# Altium PCB Power_Taghsim.PcbDoc
Units mm, origin at the board's own origin, x right, y up, seen from the top; angles counter-clockwise.
Board outline 127.99 x 54.41 mm, 2 copper layers (Top Layer, Bottom Layer); 49 components, 17 nets, 123 pads, 145 vias.
Unrouted connection lines stored in the file: 1.
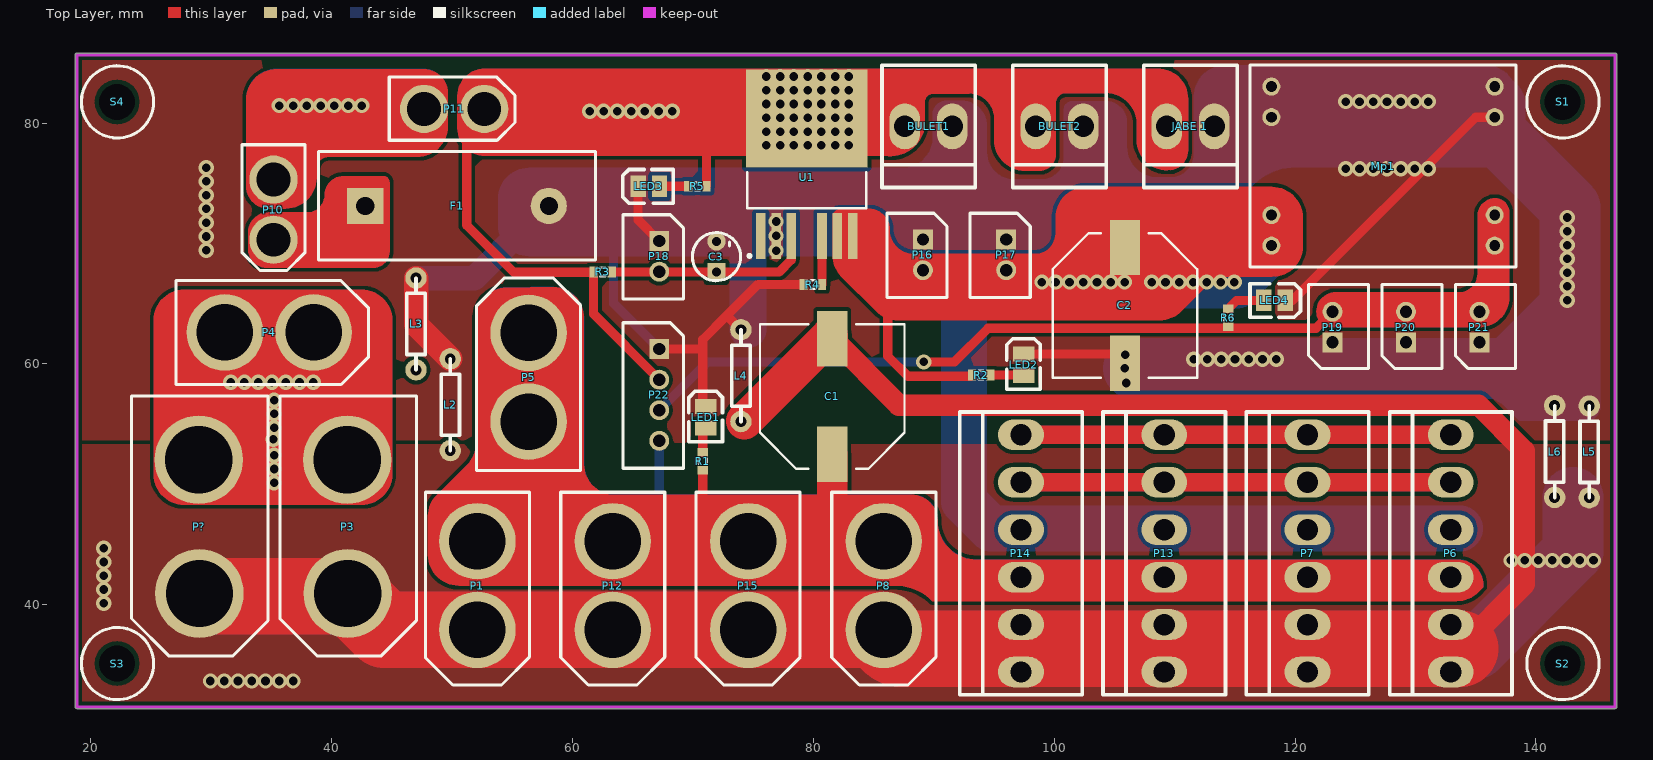
[diagram p0: Top Layer view]
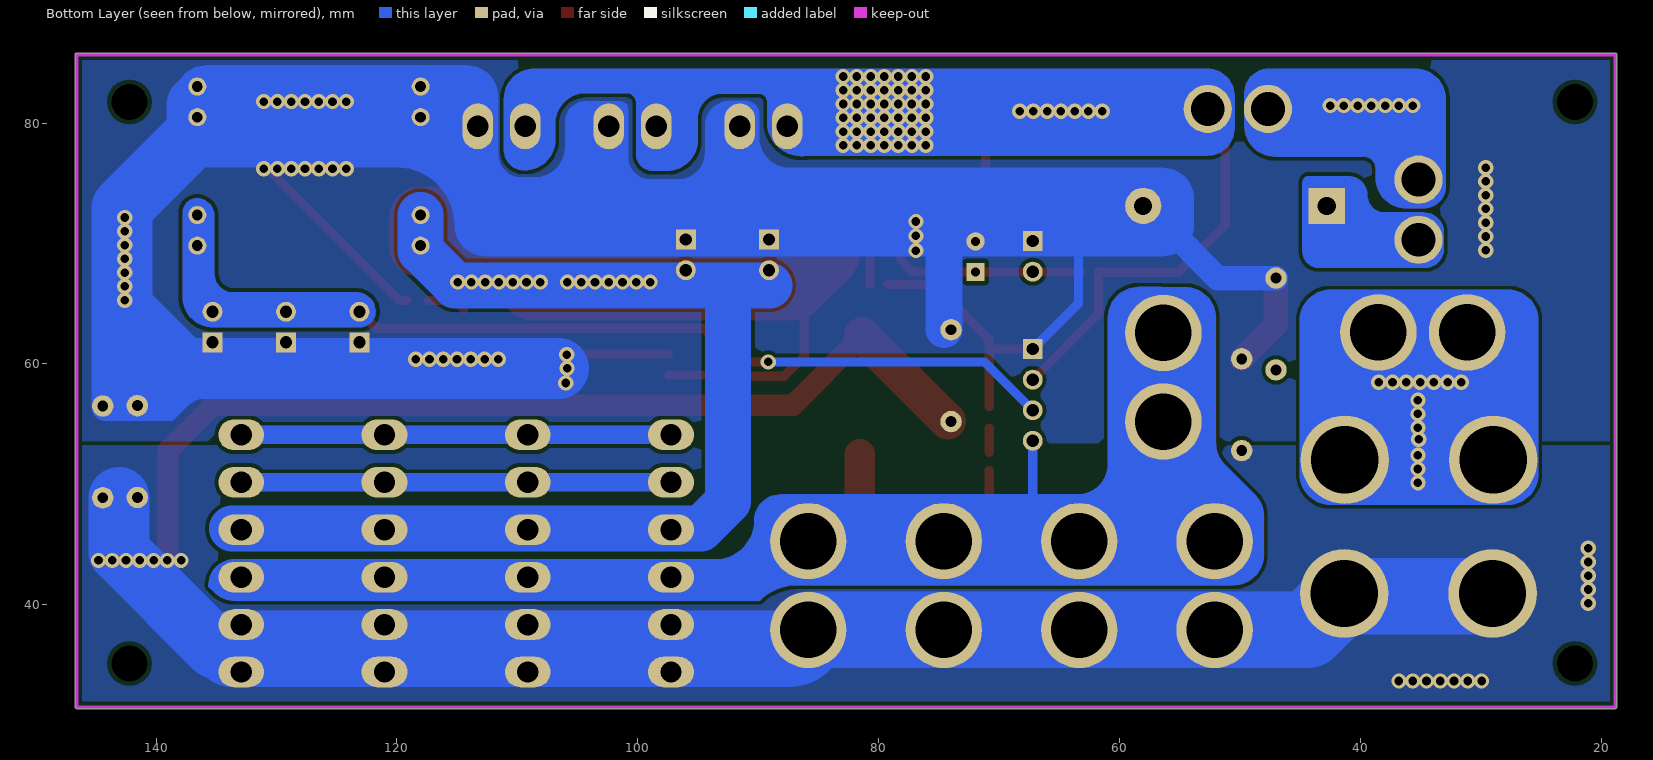
[diagram p1: Bottom Layer view, seen from below]

## Layer stack, top to bottom
Top Solder: solder mask 0.0102, Solder Resist, Dk 3.5
Top Layer: signal copper 0.0356
Dielectric 1: dielectric 0.32, FR-4, Dk 4.8
Bottom Layer: signal copper 0.0356
Bottom Solder: solder mask 0.0102, Solder Resist, Dk 3.5

## Board outline
18.847,31.394 cw(c18.847,31.521) 18.719,31.521 18.719,85.674 cw(c18.847,85.674) 18.847,85.802 146.583,85.802 cw(c146.583,85.674) 146.711,85.674 146.711,31.521 cw(c146.583,31.521) 146.583,31.394

## Design rules (kind name [scope] priority, off if disabled: settings)
AssemblyTestPointUsage [All] p1 off:
AssemblyTestpoint [All] p1 off: testpointundercomponent=TRUE minsize=1.016 maxsize=2.54 preferedsize=1.524 minholesize=0 maxholesize=1.016 preferedholesize=0.813 testpointgrid=0.025 usegrid=TRUE gridtolerance=0 allowsidetop=TRUE allowsidebottom=TRUE
Clearance Clearance_1 [All vs InPolygon] p1: gap=0.33 ignorepadtopadclearanceinfootprint=FALSE except(0: Arc-Hole Track-Hole SMDPad-Hole THPad-Hole Via-Hole Fill-Hole Poly-Hole Region-Hole Text-Hole)
Clearance [All] p2: gap=0.178 ignorepadtopadclearanceinfootprint=FALSE except(0: Arc-Hole Track-Hole SMDPad-Hole THPad-Hole Via-Hole Fill-Hole Poly-Hole Region-Hole Text-Hole)
ComponentClearance [All] p1 off: gap=0.254 collisioncheckmode=3 verticalgap=0.254 showdistances=FALSE
FabricationTestPointUsage [All] p1 off: valid=0 allowmultiple=FALSE
FabricationTestpoint [All] p1 off: side=3 testpointundercomponent=TRUE minsize=1.016 maxsize=2.54 preferedsize=1.524 minholesize=0 maxholesize=1.016 preferedholesize=0.813 testpointgrid=0.025 allowsidetop=TRUE allowsidebottom=TRUE usegrid=TRUE gridtolerance=0
Height [All] p1 off: minheight=0 maxheight=25.4 prefheight=12.7
HoleSize [All] p1 off: absolutevalues=TRUE maxlimit=2.54 minlimit=0.025 maxpercent=80.000 minpercent=20.000
HoleToHoleClearance [All] p1 off: gap=0.254 allowstackedmicrovias=TRUE
LayerPairs [All] p1 off: enforce=TRUE
MinimumSolderMaskSliver [All] p1 off: minsoldermaskwidth=0.254
NetAntennae [All] p1 off: netantennaetolerance=0
PasteMaskExpansion [All] p1 off: expansion=0
PlaneConnect [All] p1: planeconnectstyle=Direct reliefexpansion=0.508 reliefentries=4 reliefconductorwidth=0.254 reliefairgap=0.254
PolygonConnect [All] p1: connectstyle=Direct reliefconductorwidth=0.254 reliefentries=4 polygonreliefangle="90 Angle" airgapwidth=0.254
RoutingVias [All] p1: holewidth=0.4 width=0.8 viastyle="Through Hole" minholewidth=0.3 minwidth=0.6 maxholewidth=0.711 maxwidth=1.27
SilkToSilkClearance [All] p1 off: silktosilkclearance=0.254
SilkToSolderMaskClearance [IsPad] p1 off: minsilkscreentomaskgap=0.254 clearancetoexposedcopper=TRUE
SolderMaskExpansion [All] p1 off: expansion=0.102
Width [All] p1: maxlimit=10.16 minlimit=0.254 preferedwidth=0.254
15 further rules are at their usual default settings.

## Components (designator, comment, footprint, x,y, rotation, side; value= is the part's Value field where it differs from the comment)
BULET1 "Ghofl dar" con2-tiwan 89.573,79.731 r0 top
BULET2 "Ghofl dar" con2-tiwan 100.444,79.731 r0 top
C1 "Cap Pol1" "Cap Alireza montazeri" 82.372,57.099 r90 top value=470uf
C2 "Cap Pol1" "Cap Alireza montazeri" 105.07,65.079 r270 top value=470uf
C3 "Cap Pol1" LED_3MM 71.958,68.91 r270 top value=470uf
F1 "20A Normal" FUSE 50.419,73.127 r180 top
"JABE 1" "Ghofl dar" con2-tiwan 111.316,79.731 r0 top
L2 "" R3P 49.86,56.617 r90 top value=100uH
L3 "" R3P 47.015,63.322 r90 top value=100uH
L4 "" R3P 73.99,59.03 r90 top value=100uH
L5 "" R3P 144.424,52.705 r90 top value=100uH
L6 "" R3P 141.554,52.73 r90 top value=100uH
LED1 "power" 3518 71.069,55.575 r90 top
LED2 "power" 3518 97.46,59.944 r90 top
LED3 "power" 3518 66.345,74.752 r180 top
LED4 "power" 3518 118.288,65.278 r0 top
Mp1 "Mp1584" MP1584_3A 116.256,68.047 r0 top
P1 "XT60" XT-60 52.273,41.664 r0 top
P3 "XT90" XT-90 41.453,46.558 r0 top
P4 "XT60" XT-60 34.773,62.789 r90 top
P5 "XT60" XT-60 56.195,58.844 r180 top
P6 "BUS connector" CON6-TIWAN 132.931,44.272 r270 top
P7 "BUS connector" CON6-TIWAN 121.035,44.272 r270 top
P8 "XT60" XT-60 86.02,41.664 r0 top
P10 "XT30" XT-30 32.579,67.711 r0 top
P11 "XT30" XT-30 55.28,78.578 r90 top
P12 "XT60" XT-60 63.517,41.664 r0 top
P13 "BUS connector" con6-tiwan 109.14,44.272 r270 top
P14 "BUS connector" con6-tiwan 97.244,44.272 r270 top
P15 "XT60" XT-60 74.761,41.664 r0 top
P16 "Fan" "JP CIRCULAR 2" 89.103,70.333 r270 top
P17 "Fan" "JP CIRCULAR 2" 96.012,70.333 r270 top
P18 "switch EN" "jp circular 2" 67.208,70.206 r270 top
P19 "" "JP CIRCULAR 2" 123.114,61.798 r90 top
P20 "" "JP CIRCULAR 2" 129.21,61.798 r90 top
P21 "" "JP CIRCULAR 2" 135.306,61.798 r90 top
P22 "Monitoring" "JP CIRCULAR 4" 67.208,61.239 r270 top
P? "XT90" XT-90 29.134,46.558 r0 top
R1 "Res1" j1-0603 70.815,51.918 r90 top value=220
R2 "Res1" j1-0603 93.929,59.08 r0 top value=220
R3 "" j1-0603 62.509,67.64 r0 top value=10K
R4 "Res1" j1-0603 79.971,66.599 r0 top value=1K
R5 "Res1" j1-0603 70.383,74.752 r180 top value=220
R6 "Res1" j1-0603 114.452,63.83 r90 top value=220
S1 "Screw Hole" "Screw Holw 3-6 mm" 142.24,81.763 r0 top
S2 "Screw Hole" "Screw Holw 3-6 mm" 142.24,35.128 r0 top
S3 "Screw Hole" "Screw Holw 3-6 mm" 22.225,35.128 r0 top
S4 "Screw Hole" "Screw Holw 3-6 mm" 22.225,81.763 r0 top
U1 "BTS640S2G" TO127P1490X440-8_7N 79.451,76.581 r90 top

## Footprints (in the part's own frame and the unit in brackets; to place one, negate y for a bottom-side part, rotate by r counter-clockwise, add the part's x,y. Pads: shape width x height; smd on the part's side, far side on the other; paste and mask are expansions set on the pad)
3518 [mil]
  rect 50x70 smd: 1(35,0) 2(-35,0)
  silkscreen extent -80,-55 85,55, body extent -63,-31 63,32, height 43
"Cap Alireza montazeri" [mm]
  rect 4.6x2.5 smd: 1(-4.592,0.797) 2(5.008,0.797)
  silkscreen extent -5.79,-5.2 6.21,6.8, body extent -5.19,-4.6 5.61,6.2, height 6.9
con2-tiwan [mil]
  oval 100x150 hole 70: 1(-77.5,0) 2(77.5,0)
  silkscreen extent -152,-200 152,200
CON6-TIWAN [mil]
  oval 100x150 hole 70: 1(-387.5,0) 2(-232.5,0) 3(-77.5,0) 4(77.5,0) 5(232.5,0) 6(387.5,0)
  silkscreen extent -463,-200 463,200
con6-tiwan [mil]
  oval 100x150 hole 70: 1(-387.5,0) 2(-232.5,0) 3(-77.5,0) 4(77.5,0) 5(232.5,0) 6(387.5,0)
  silkscreen extent -463,-200 463,200
FUSE [mm]
  rect 3x3 hole 1.5: 1(7.62,0)
  round 3 hole 1.5: 2(-7.62,0)
  silkscreen extent -11.5,-4.5 11.5,4.5, body extent -11.6,-4.65 11.63,4.62, height 4
j1-0603 [mm] "Chip Resistor, Body 1.6x0.8mm, IPC High Density"
  rect 0.7x0.9 smd: 1(-0.75,0) 2(0.75,0)
  silkscreen extent -0.2,-0.35 0.2,0.35, body extent -0.85,-0.48 0.85,0.48, height 0.9
"JP CIRCULAR 2" [mil]
  rect 65x65 hole 40: 1(0,0)
  round 65 hole 40: 2(100,0)
  silkscreen extent -86,-118 190,79, body extent -96,-118 196,75, height 216
"jp circular 2" [mil]
  rect 65x65 hole 40: 1(0,0)
  round 65 hole 40: 2(100,0)
  silkscreen extent -86,-118 190,79, body extent -96,-118 196,75, height 216
"JP CIRCULAR 4" [mil]
  rect 65x65 hole 40: 1(0,0)
  round 65 hole 40: 2(100,0) 3(200,0) 4(300,0)
  silkscreen extent -86,-118 390,79, body extent -92,-118 396,74, height 216
LED_3MM [mil]
  rect 60x60 hole 30: 1(50,0)
  round 60 hole 30: 2(-50,0)
  silkscreen extent -79,-79 79,79, body extent -80,-78 80,76, height 118
MP1584_3A [mm]
  round 1.5 hole 0.9: 1(1.778,12.446) 1(1.778,14.986) 2(1.778,1.778) 2(1.778,4.318) 3(20.32,12.446) 3(20.32,14.986) 4(20.32,1.778) 4(20.32,4.318)
  silkscreen extent 0,0 22.1,16.76
R3P [mil]
  round 70 hole 35.43: 1(-150,0) 2(150,0)
  silkscreen extent -150,-30 150,30
"Screw Holw 3-6 mm" [mm]
  round 0 hole 3: 0(-0.025,0)
  silkscreen extent -3,-3 3,3
TO127P1490X440-8_7N [mm] "TO,1.27mm pitch;7 pin,14.90mm L X 9.20mm W X 4.40mm H body"
  rect 3.85x0.8 smd paste+0 mask+0: 1(-5.95,3.81) 2(-5.95,2.54) 3(-5.95,1.27) 5(-5.95,-1.27) 6(-5.95,-2.54) 7(-5.95,-3.81)
  rect 8.15x10.1 smd paste+0 mask+0: 8(3.8,0)
  silkscreen extent -7.72,-4.95 -0.65,4.95, body extent -7.47,-5 7.48,5, height 4.51
XT-30 [mm]
  round 4 hole 2.8: +(2.6,7.6) -(2.6,2.6)
  silkscreen extent 0,0.05 5.23,10.49, body extent 0.01,0.01 5.26,10.46, height 13.5
XT-60 [mil]
  round 250 hole 185: +(-6.6,142.68) -(-6.6,-147.32)
  silkscreen extent -177,-327 163,303, body extent -162,-309 153,305, height 646
XT-90 [mil]
  round 289.37 hole 220: +(-6,216) -(-4,-221)
  silkscreen extent -226,-426 220,424, body extent -226,-423 207,419, height 217

## Part data
BULET1 BULET2 "JABE 1" P1 P3 P4 P5 P8 P10 P11 P12 P15 P16 P17 P18 P19 P20 P21 P?: library part "Header 2", "Header, 2-Pin", LatestRevisionDate=17-Jul-2002, LatestRevisionNote="Re-released for DXP Platform.", Publisher="Altium Limited"
C1 C2 C3: "Polarized Capacitor (Radial)", LatestRevisionDate=17-Jul-2002, LatestRevisionNote="Re-released for DXP Platform.", PackageReference=RB7.6-15, Published=8-Jun-2000, Publisher="Altium Limited"
F1: library part "Fuse 2", "Fuse", Manufacturer="Generic Components", Class=Passive, Published=08/06/2000, Publisher="Altium Hobart Technology Centre", SubClass=Fuse
L2 L3 L4 L5 L6: library part Inductor, "Inductor", Manufacturer="Generic Components", Class=Passive, Published=08/06/2000, Publisher="Altium Hobart Technology Centre", SubClass=Inductor
LED1 LED2 LED3 LED4: library part LED3, "Typical BLUE SiC LED", PackageDocument=16-Apr-2002, DatasheetDocument=16-Apr-2002, LatestRevisionDate=17-Dec-2003, LatestRevisionNote="PCB Footprint replaced.", PackageReference=3.5X2.8X1.9, Published=8-Jun-2000, Publisher="Altium Limited"
P6 P7 P13 P14: library part "Header 6", "Header, 6-Pin", LatestRevisionDate=17-Jul-2002, LatestRevisionNote="Re-released for DXP Platform.", Publisher="Altium Limited"
P22: library part "Header 4", "Header, 4-Pin", LatestRevisionDate=17-Jul-2002, LatestRevisionNote="Re-released for DXP Platform.", Publisher="Altium Limited"
R1 R2 R4 R5 R6: "Resistor", LatestRevisionDate=17-Jul-2002, LatestRevisionNote="Re-released for DXP Platform.", PackageReference=AXIAL-0.3, Published=8-Jun-2000, Publisher="Altium Limited"
R3: library part Res1, "Resistor", Manufacturer="Generic Components", Class=Passive, Published=08/06/2000, Publisher="Altium Hobart Technology Centre", SubClass=Resistor
U1: "Smart Sense High-Side Power Switch, VBB 43V, R(ON) 30mOhm", Manufacturer="Infineon Technologies", ManufacturerPartNumber=BTS640S2G, PackageReference=PG-TO263-7-2

## Via types
v1: diameter 1.27, hole 0.711, Top Layer to Bottom Layer, tented both sides, 145 vias

## Nets (pads, with @x,y where several pads share a name; then routed paths per layer and width w, separated by ;. In a path a pad name is that pad's centre, name@x,y a point inside that pad or via, vN(x,y) a via of type N, cw(c..) or ccw(c..) an arc to the next point about the centre after c; other vN are vias at no path point)
+5: Mp1.4 P19.2 P20.2 P21.2 P22.3 R6.1 | length 59.3
  Top Layer w0.762: v1(89.179,60.173) 91.719,60.173 94.513,62.967 121.742,62.967 P19.2
  Bottom Layer w0.762: P22.3 71.222,60.173 v1(89.179,60.173)
+12: C2.1 Mp1.2 P6.3 P7.3 P13.3 P14.3 P16.2 P17.2 R2.1 U1.6 U1.7 | length 104.8
  Top Layer w0.762: 86.182,64.516 86.182,60.655 87.859,58.979 93.078,58.979 R2.1
  Bottom Layer w3.81: 89.078,66.523 92.507,66.523 ; Mp1.2@118.034,72.365 118.034,69.825 118.034,69.393 115.164,66.523 113.817,66.523 111.531,66.523 105.842,66.523 103.556,66.523 101.27,66.523 92.507,66.523 ; P6.3@133.706,46.33 94.767,46.33 92.507,48.59 92.507,66.523
  other v1: 98.984,66.802 100.127,66.802 101.27,66.802 102.413,66.802 103.556,66.802 104.699,66.802 105.842,66.802 108.102,66.802 109.245,66.802 110.388,66.802 111.531,66.802 112.674,66.802 113.817,66.802 114.96,66.802
+16: C1.1 P1.+ P5.+ P5.- P6.4 P7.4 P8.+ P12.+ P13.4 P14.4 P15.+ P22.4 R1.1 | length 14.4
  Top Layer w0.762: 70.815,48.768 R1.1
  Top Layer w2.54: 81.575,47.717 C1.1
  Top Layer w4.572: 56.363,46.453 ccw(c58.01,46.453) 56.845,45.288
  Bottom Layer w0.762: P22.4 67.208,48.008 ccw(c67.642,48.008) 67.335,47.701
D+: P6.1 P7.1 P13.1 P14.1 | length 71.4
  Top Layer w1.524: P14.1 P13.1 P7.1 P6.1
  Bottom Layer w1.524: P14.1 P13.1 P7.1 P6.1
D-: P6.2 P7.2 P13.2 P14.2 | length 71.4
  Top Layer w1.524: P14.2 P13.2 P7.2 P6.2
  Bottom Layer w1.524: P14.2 P13.2 P7.2 P6.2
direct_12: "JABE 1.1" BULET1.1 BULET2.1 P11.- P22.2 R3.1 R5.1 U1.8 | length 33.4
  Top Layer w0.762: 51.232,78.359 51.232,71.526 55.143,67.615 61.48,67.615 R3.1@61.531,67.666 ; R3.1 61.759,64.148 P22.2 ; R5.1 71.133,78.169
  other v1: 76.098,78.156 77.241,78.156 78.384,78.156 79.527,78.156 80.67,78.156 81.813,78.156 82.956,78.156 76.098,79.299 77.241,79.299 78.384,79.299 79.527,79.299 80.67,79.299 81.813,79.299 82.956,79.299 76.098,80.442 77.241,80.442 78.384,80.442 79.527,80.442 80.67,80.442 81.813,80.442 82.956,80.442 61.443,80.975 62.586,80.975 63.729,80.975 64.872,80.975 66.015,80.975 67.158,80.975 68.301,80.975 76.098,81.585 77.241,81.585 78.384,81.585 79.527,81.585 80.67,81.585 81.813,81.585 82.956,81.585 76.098,82.728 77.241,82.728 78.384,82.728 79.527,82.728 80.67,82.728 81.813,82.728 82.956,82.728 76.098,83.871 77.241,83.871 78.384,83.871 79.527,83.871 80.67,83.871 81.813,83.871 82.956,83.871
GND: "JABE 1.2" BULET1.2 BULET2.2 C2.2 C3.2 F1.2 L2.2 L3.2 L4.2 L5.2 L6.2 LED1.1 LED2.1 LED3.1 LED4.1 Mp1.1 Mp1.3 P16.1 P17.1 P18.1 P19.1 P20.1 P21.1 P22.1 R4.1 U1.2 | length 154
  Top Layer w0.762: LED3.1 65.456,71.958 P18.1 ; P22.1 70.79,61.239 70.815,61.214 ; LED1.1@70.815,56.464 70.815,61.214 ; L4.2 72.847,63.983 72.771,63.983 ; R4.1 75.387,66.599 72.771,63.983 ; LED2.1 105.842,60.833 v1(105.893,60.782) ; LED4.1 119.786,65.278 135.001,80.493 Mp1.3@136.576,80.493 ; 70.815,61.214 70.815,62.027 72.771,63.983
  Top Layer w2.032: L3.2 47.015,63.271 L2.2
  Bottom Layer w0.762: 63.424,70.079 63.424,65.024 P22.1
  Bottom Layer w2.032: L3.2 51.841,67.132 56.337,71.628
  Bottom Layer w3.048: L4.2@74.574,62.84 74.574,70.968
  Bottom Layer w5.08: 106.578,59.635 113.868,59.635 118.44,59.635 129.21,59.635 137.79,59.635 142.824,64.668 142.824,67.589 142.824,69.875 142.824,73 136.576,79.248 136.576,80.493 136.576,81.509
  other v1: 105.994,58.42 105.877,59.635 111.582,60.401 112.725,60.401 113.868,60.401 115.011,60.401 116.154,60.401 117.297,60.401 118.44,60.401 142.596,65.303 142.596,66.446 142.596,67.589 142.596,68.732 76.911,69.418 29.591,69.444 142.596,69.875 29.591,70.587 76.911,70.631 142.596,71.018 29.591,71.73 76.911,71.831 142.596,72.161 29.591,72.873 29.591,74.016 29.591,75.159 124.206,76.2 125.349,76.2 126.492,76.2 127.635,76.2 128.778,76.2 129.921,76.2 131.064,76.2 29.591,76.302 124.206,81.788 125.349,81.788 126.492,81.788 127.635,81.788 128.778,81.788 129.921,81.788 131.064,81.788
IN_12: P10.+ P11.+
  other v1: 35.662,81.458 36.805,81.458 37.948,81.458 39.091,81.458 40.234,81.458 41.377,81.458 42.52,81.458
IN_16: P3.+ P4.+ P4.- P?.+
  other v1: 35.23,50.14 35.23,51.283 35.23,52.426 35.154,53.746 35.23,54.712 35.23,55.855 35.23,56.998 31.623,58.496 32.766,58.496 33.909,58.496 35.052,58.496 36.195,58.496 37.338,58.496 38.481,58.496
NetF1_1: F1.1 P10.-
NetLED1_1: LED1.2 R1.2 | length 2
  Top Layer w0.762: R1.2 LED1.2@70.815,54.686
NetLED2_1: LED2.2 R2.2 | length 2.8
  Top Layer w0.762: R2.2 97.434,59.08 LED2.2
NetLED3_1: LED3.2 R5.2 | length 2.4
  Top Layer w0.762: LED3.2 R5.2
NetLED4_1: LED4.2 R6.2 | length 3.2
  Top Layer w0.762: R6.2 115.15,65.278 LED4.2
NetR4_2: R4.2 U1.5 | length 4
  Top Layer w0.762: R4.2 U1.5
PGND: C1.2 L2.1 L3.1 L4.1 L5.1 L6.1 P1.- P3.- P6.5 P6.6 P7.5 P7.6 P8.- P12.- P13.5 P13.6 P14.5 P14.6 P15.- P?.- | length 321
  Top Layer w1.778: C1.2@81.372,62.362 81.599,62.132 87.091,56.591 135.23,56.591 139.04,52.781 139.04,41.707 133.706,36.373
  Top Layer w3.048: L4.1@74.275,55.265 C1.2@81.372,62.362
  Top Layer w6.35: P?.-@29.032,40.716 41.58,40.716 44.374,37.922 P1.- P12.- P15.- P8.- ccw(c87.401,37.922) 87.401,36.373 133.706,36.373
  Bottom Layer w3.81: 133.706,36.373 135.052,36.373
  Bottom Layer w5.08: 135.052,36.373 143.078,44.399 143.078,48.92
  Bottom Layer w6.35: P?.-@29.032,40.716 41.58,40.716 44.374,37.922 P1.- P12.- P15.- P8.- ccw(c87.401,37.922) 87.401,36.373 133.706,36.373
  other v1: 29.947,33.68 31.09,33.68 32.233,33.68 33.376,33.68 34.519,33.68 35.662,33.68 36.805,33.68 21.082,40.132 21.082,41.275 21.082,42.418 21.082,43.561 137.922,43.688 139.065,43.688 140.208,43.688 141.351,43.688 142.494,43.688 143.637,43.688 144.78,43.688 21.082,44.704
Power_12_EN: C3.1 P18.2 R3.2 U1.3 | length 17.3
  Top Layer w0.762: R3.2 77.165,67.64 78.181,68.656 U1.3
pads on no net: S1.0 S2.0 S3.0 S4.0 U1.1

## Polygon pours and split planes (outlines as drawn)
GND on Bottom Layer "Bottom Layer-No Net" (solid, remove dead copper, pour order 6): 146.583,53.442 146.583,85.674 18.847,85.674 18.847,53.388
PGND on Bottom Layer "Bottom Layer-No Net" (solid, remove dead copper, pour order 0): 146.583,31.521 146.583,53.264 18.847,53.264 18.847,31.521
GND on Top Layer "Bottom Layer-No Net" (solid, remove dead copper, pour order 4): 146.583,53.518 146.583,85.674 18.847,85.674 18.847,53.437
PGND on Top Layer "Bottom Layer-No Net" (solid, remove dead copper, pour order 2): 18.847,31.51 18.847,53.34 146.583,53.34 146.583,31.699

## Keep-outs
Keep-Out Layer:
  lines w0.254: 18.847,31.521 146.583,31.521 146.583,85.674 18.847,85.674 18.847,31.521

## Other copper
Top Layer:
  region net IN_16: 27.762,66.167 ccw(c27.762,63.627) 25.222,63.627 25.222,50.851 ccw(c27.762,50.851) 27.762,48.311 42.494,48.311 ccw(c42.494,50.851) 45.034,50.851 45.034,63.627 ccw(c42.494,63.627) 42.494,66.167
  region net +16: 56.464,66.345 54.534,66.345 ccw(c54.534,63.805) 51.994,63.805 51.994,53.427 cw(c49.454,53.427) 51.25,51.631 48.717,49.098 ccw(c50.434,47.381) 48.006,47.381 48.006,44.145 ccw(c50.546,44.145) 50.546,41.605 86.758,41.605 cw(c86.758,37.183) 89.885,40.31 133.416,40.31 ccw(c133.416,42.85) 135.212,41.054 135.636,41.478 135.636,41.631 ccw(c133.502,41.631) 133.502,43.764 93.523,43.764 cw(c93.523,46.965) 90.322,46.965 ccw(c88.138,46.965) 88.138,49.149 63.5,49.149 cw(c63.5,51.689) 60.96,51.689 60.96,63.83 ccw(c58.42,63.83) 58.42,66.37 56.515,66.37
  region net +12: 81.596,72.187 cw(c82.307,72.187) 82.307,72.898 84.593,72.898 cw(c84.593,71.145) 86.345,71.145 ccw(c88.352,71.145) 88.352,69.139 98.41,69.139 ccw(c98.41,70.841) 100.112,70.841 100.112,72.161 cw(c102.652,72.161) 102.652,74.701 118.095,74.701 cw(c118.095,72.161) 120.635,72.161 120.635,69.774 cw(c118.095,69.774) 118.095,67.234 114.474,67.234 ccw(c114.474,64.694) 112.678,66.49 110.559,64.371 cw(c108.763,66.167) 108.763,63.627 87.016,63.627 cw(c87.016,66.167) 85.22,64.371 82.339,67.252 cw(c84.136,69.048) 81.596,69.048
  region net direct_12: 52.73,77.292 cw(c52.73,79.578) 50.444,79.578 50.444,82.245 cw(c52.73,82.245) 52.73,84.531 108.585,84.531 cw(c108.585,81.991) 111.125,81.991 111.125,77.749 cw(c109.449,77.749) 109.449,76.073 109.398,76.073 cw(c109.398,78.613) 106.858,78.613 106.858,79.934 ccw(c104.318,79.934) 104.318,82.474 100.94,82.474 ccw(c100.94,81.661) 100.127,81.661 100.127,77.419 cw(c98.755,77.419) 98.755,76.048 97.561,76.048 cw(c97.561,78.588) 95.021,78.588 95.021,80.391 ccw(c92.964,80.391) 92.964,82.448 89.967,82.448 ccw(c89.967,81.737) 89.256,81.737 89.256,79.731 cw(c86.411,80.123) 85.928,77.292
  region net IN_12: 34.771,72.903 36.218,72.903 ccw(c36.218,75.443) 38.758,75.443 38.758,76.179 cw(c39.774,76.179) 39.774,77.195 47.115,77.195 ccw(c47.115,79.735) 49.655,79.735 49.655,82.479 ccw(c47.648,82.479) 47.648,84.485 35.456,84.485 ccw(c35.456,81.945) 32.916,81.945 32.916,74.757 ccw(c34.771,74.757)
  region net NetF1_1: 43.47,67.989 ccw(c43.47,69.335) 44.816,69.335 44.816,75.101 ccw(c44.308,75.101) 44.308,75.609 41.006,75.609 ccw(c41.006,74.034) 39.431,74.034 cw(c37.983,74.034) 37.983,72.586 34.732,72.586 ccw(c34.732,70.935) 33.081,70.935 33.081,69.513 ccw(c34.605,69.513) 34.605,67.989
  region net +5: 136.627,73.762 ccw(c136.627,72.288) 135.153,72.288 135.153,67.488 cw(c133.629,67.488) 133.629,65.964 123.393,65.964 ccw(c123.393,64.338) 121.768,64.338 ccw(c123.063,64.338) 123.063,63.043 135.255,63.043 ccw(c135.255,65.583) 137.795,65.583 137.795,72.568 ccw(c136.601,72.568) 136.601,73.762
Bottom Layer:
  region net IN_16: 27.762,66.167 ccw(c27.762,63.627) 25.222,63.627 25.222,50.851 ccw(c27.762,50.851) 27.762,48.311 42.494,48.311 ccw(c42.494,50.851) 45.034,50.851 45.034,63.627 ccw(c42.494,63.627) 42.494,66.167
  region net +16: 56.475,66.37 54.545,66.37 ccw(c54.545,63.83) 52.005,63.83 52.005,53.452 cw(c49.465,53.452) 51.261,51.656 48.728,49.124 ccw(c50.445,47.407) 48.017,47.407 48.017,44.171 ccw(c50.557,44.171) 50.557,41.631 86.769,41.631 cw(c86.769,37.208) 89.896,40.335 133.426,40.335 ccw(c133.426,42.875) 135.222,41.079 135.647,41.504 135.647,41.656 ccw(c133.513,41.656) 133.513,43.79 93.534,43.79 cw(c93.534,46.99) 90.333,46.99 ccw(c88.149,46.99) 88.149,49.174 63.511,49.174 cw(c63.511,51.714) 60.971,51.714 60.971,63.856 ccw(c58.431,63.856) 58.431,66.396 56.526,66.396
  region net GND: 56.363,76.276 ccw(c56.363,73.736) 53.823,73.736 53.823,71.501 ccw(c56.363,71.501) 56.363,68.961 112.674,68.961 ccw(c112.674,71.501) 115.214,71.501 cw(c120.04,71.501) 120.04,76.327 135.865,76.327 ccw(c135.865,78.867) 138.405,78.867 138.405,82.245 ccw(c135.865,82.245) 135.865,84.785 114.148,84.785 ccw(c114.148,82.245) 111.608,82.245 111.608,77.47 cw(c109.626,77.47) 109.626,75.489 108.585,75.489 cw(c108.585,78.029) 106.045,78.029 106.045,80.086 ccw(c104.318,80.086) 104.318,81.813 101.448,81.813 ccw(c101.448,81.178) 100.813,81.178 100.813,77.191 cw(c98.958,77.191) 98.958,75.336 96.672,75.336 cw(c96.672,77.597) 94.412,77.597 94.412,79.781 ccw(c92.329,79.781) 92.329,81.864 91.034,81.864 ccw(c91.034,80.747) 89.916,80.747 89.916,78.816 cw(c87.376,78.816) 87.376,76.276
  region net direct_12: 52.73,77.292 cw(c52.73,79.578) 50.444,79.578 50.444,82.245 cw(c52.73,82.245) 52.73,84.531 108.585,84.531 cw(c108.585,81.991) 111.125,81.991 111.125,77.749 cw(c109.449,77.749) 109.449,76.073 109.398,76.073 cw(c109.398,78.613) 106.858,78.613 106.858,79.934 ccw(c104.318,79.934) 104.318,82.474 100.94,82.474 ccw(c100.94,81.661) 100.127,81.661 100.127,77.419 cw(c98.755,77.419) 98.755,76.048 97.561,76.048 cw(c97.561,78.588) 95.021,78.588 95.021,80.391 ccw(c92.964,80.391) 92.964,82.448 89.967,82.448 ccw(c89.967,81.737) 89.256,81.737 89.256,79.731 cw(c86.411,80.123) 85.928,77.292
  region net IN_12: 34.753,72.929 36.201,72.929 ccw(c36.201,75.469) 38.741,75.469 38.741,76.206 cw(c39.757,76.206) 39.757,77.222 47.098,77.222 ccw(c47.098,79.762) 49.638,79.762 49.638,82.505 ccw(c47.631,82.505) 47.631,84.511 35.439,84.511 ccw(c35.439,81.971) 32.899,81.971 32.899,74.783 ccw(c34.753,74.783)
  region net NetF1_1: 43.47,67.989 ccw(c43.47,69.335) 44.816,69.335 44.816,75.101 ccw(c44.308,75.101) 44.308,75.609 41.006,75.609 ccw(c41.006,74.034) 39.431,74.034 cw(c37.983,74.034) 37.983,72.586 34.732,72.586 ccw(c34.732,70.935) 33.081,70.935 33.081,69.513 ccw(c34.605,69.513) 34.605,67.989
  region net +5: 136.627,73.762 ccw(c136.627,72.288) 135.153,72.288 135.153,67.488 cw(c133.629,67.488) 133.629,65.964 123.393,65.964 ccw(c123.393,64.338) 121.768,64.338 ccw(c123.063,64.338) 123.063,63.043 135.255,63.043 ccw(c135.255,65.583) 137.795,65.583 137.795,72.568 ccw(c136.601,72.568) 136.601,73.762
  region net GND: 145.339,65.253 145.339,56.413 cw(c144.196,56.413) 144.196,55.27 138.633,55.27 137.472,56.431 ccw(c135.676,54.635) 135.676,57.175 132.918,57.175

## Silkscreen, mask and mechanical layers (free items; w line width, h text height)
Top Solder:
  region: 31.14,64.948 ccw(c31.14,62.636) 28.829,62.636 28.829,57.532 cw(c24.513,57.532) 27.564,54.479 ccw(c29.344,51.944) 26.292,51.409 cw(c26.346,51.472) 26.264,51.472 26.264,51.794 ccw(c28.804,51.791) 28.804,49.251 41.478,49.251 ccw(c41.478,51.791) 44.018,51.791 44.018,52.035 ccw(c41.051,52.035) 43.149,54.133 41.587,55.695 cw(c43.383,57.491) 40.843,57.491 40.843,62.611 ccw(c38.481,62.611) 38.481,64.973
  lines w4.572: 29.032,40.945 40.615,40.945
  text "Robotic Teams" at 20.599,75.819 h1.52 r270
  text "KN2C" at 24.46,75.819 h1.52 r270
Bottom Solder:
  region: 31.14,64.948 ccw(c31.14,62.636) 28.829,62.636 28.829,57.532 cw(c24.513,57.532) 27.564,54.479 ccw(c29.344,51.944) 26.292,51.409 cw(c26.346,51.472) 26.264,51.472 26.264,51.794 ccw(c28.804,51.791) 28.804,49.251 41.478,49.251 ccw(c41.478,51.791) 44.018,51.791 44.018,52.035 ccw(c41.051,52.035) 43.149,54.133 41.587,55.695 cw(c43.383,57.491) 40.843,57.491 40.843,62.611 ccw(c38.481,62.611) 38.481,64.973
  region: 33.172,70.256 ccw(c35.077,70.256) 35.077,68.351 41.783,68.351 ccw(c41.783,70.891) 44.323,70.891 44.323,73.863 ccw(c42.977,73.863) 42.977,75.209 41.885,75.209 ccw(c41.885,73.939) 40.615,73.939 cw(c38.964,73.939) 38.964,72.288 35.204,72.288 ccw(c35.204,70.256)
  region: 35.179,73.203 ccw(c35.179,75.311) 37.287,75.311 37.287,76.962 cw(c39.421,76.962) 39.421,79.096 47.676,79.096 ccw(c47.676,81.178) 49.759,81.178 49.759,81.204 ccw(c47.676,81.204) 47.676,83.287 35.992,83.287 ccw(c35.992,80.747) 33.452,80.747 33.452,74.93 ccw(c35.179,74.93)
  region: 50.571,81.178 ccw(c52.68,81.178) 52.68,79.07 85.903,79.07 cw(c85.903,78.715) 86.258,78.715 ccw(c87.224,78.715) 87.224,77.749 87.782,77.749 ccw(c87.782,78.918) 88.951,78.918 88.951,82.169 cw(c89.662,82.169) 89.662,82.88 93.65,82.88 cw(c93.65,80.645) 95.885,80.645 95.885,79.299 ccw(c98.425,79.299) 98.425,76.759 98.45,76.759 ccw(c98.45,78.181) 99.873,78.181 99.873,82.042 cw(c100.686,82.042) 100.686,82.855 104.953,82.855 cw(c104.953,80.315) 107.493,80.315 107.493,78.461 ccw(c109.372,78.461) 109.372,76.581 ccw(c109.372,77.953) 110.744,77.953 110.744,81.712 ccw(c108.204,81.712) 108.204,84.252 53.137,84.252 ccw(c53.137,81.712) 50.597,81.712 50.597,81.178
  region: 58.064,75.565 56.921,75.565 ccw(c56.921,73.203) 54.559,73.203 54.559,72.06 ccw(c57.099,72.06) 57.099,69.52 112.166,69.52 ccw(c112.166,72.06) 114.706,72.06 114.706,73.065 cw(c117.246,73.065) 115.45,74.861 117.272,76.683 cw(c118.56,75.395) 118.56,77.216 134.925,77.216 ccw(c134.925,79.756) 137.465,79.756 137.465,82.499 ccw(c135.788,82.499) 135.788,84.176 114.503,84.176 ccw(c114.503,81.636) 111.963,81.636 111.963,77.597 cw(c109.423,77.597) 109.423,75.057 107.696,75.057 cw(c107.696,77.597) 105.156,77.597 105.156,80.035 ccw(c103.556,80.035) 103.556,81.636 102.184,81.636 ccw(c102.184,80.594) 101.143,80.594 101.143,77.064 cw(c98.958,77.064) 98.958,74.879 96.393,74.879 cw(c96.393,77.419) 93.853,77.419 93.853,79.629 ccw(c91.846,79.629) 91.846,81.636 91.542,81.636 ccw(c91.542,80.34) 90.246,80.34 90.246,78.13 cw(c87.706,78.13) 87.706,75.59 87.198,75.59
  region: 145.313,65.278 145.313,56.439 cw(c144.17,56.439) 144.17,55.296 138.608,55.296 137.447,56.457 ccw(c135.651,54.661) 135.651,57.201 132.893,57.201
  lines w2.032: 87.249,45.161 88.417,45.161 91.275,42.304 97.244,42.304 109.14,42.304 121.035,42.304 132.931,42.304
  lines w2.54: 89.078,66.523 92.507,66.523 ; 118.034,72.365 118.034,69.825 118.034,69.393 115.164,66.523 92.507,66.523 ; 133.706,46.33 94.767,46.33 92.507,48.59 92.507,66.523
  lines w4.572: 29.032,40.716 40.615,40.716 45.517,35.814 134.442,35.814 143.104,44.475 143.104,48.971 ; 52.106,45.288 56.845,45.288 63.349,45.288 74.593,45.288 87.122,45.288 87.249,45.161 ; 56.363,46.453 56.363,55.22 56.363,62.586 ; 87.427,36.398 88.011,35.814
  lines w5.08: 106.553,59.66 129.184,59.66 137.765,59.66 142.799,64.694 142.799,73.025 136.55,79.273